# Altium PCB PCB_BTRC.PcbDoc
Units mm, origin at the board's own origin, x right, y up, seen from the top; angles counter-clockwise.
Board outline 112.57 x 70.97 mm, 2 copper layers (Top Layer, Bottom Layer); 51 components, 27 nets, 169 pads, 33 vias.
Unrouted connection lines stored in the file: 1.
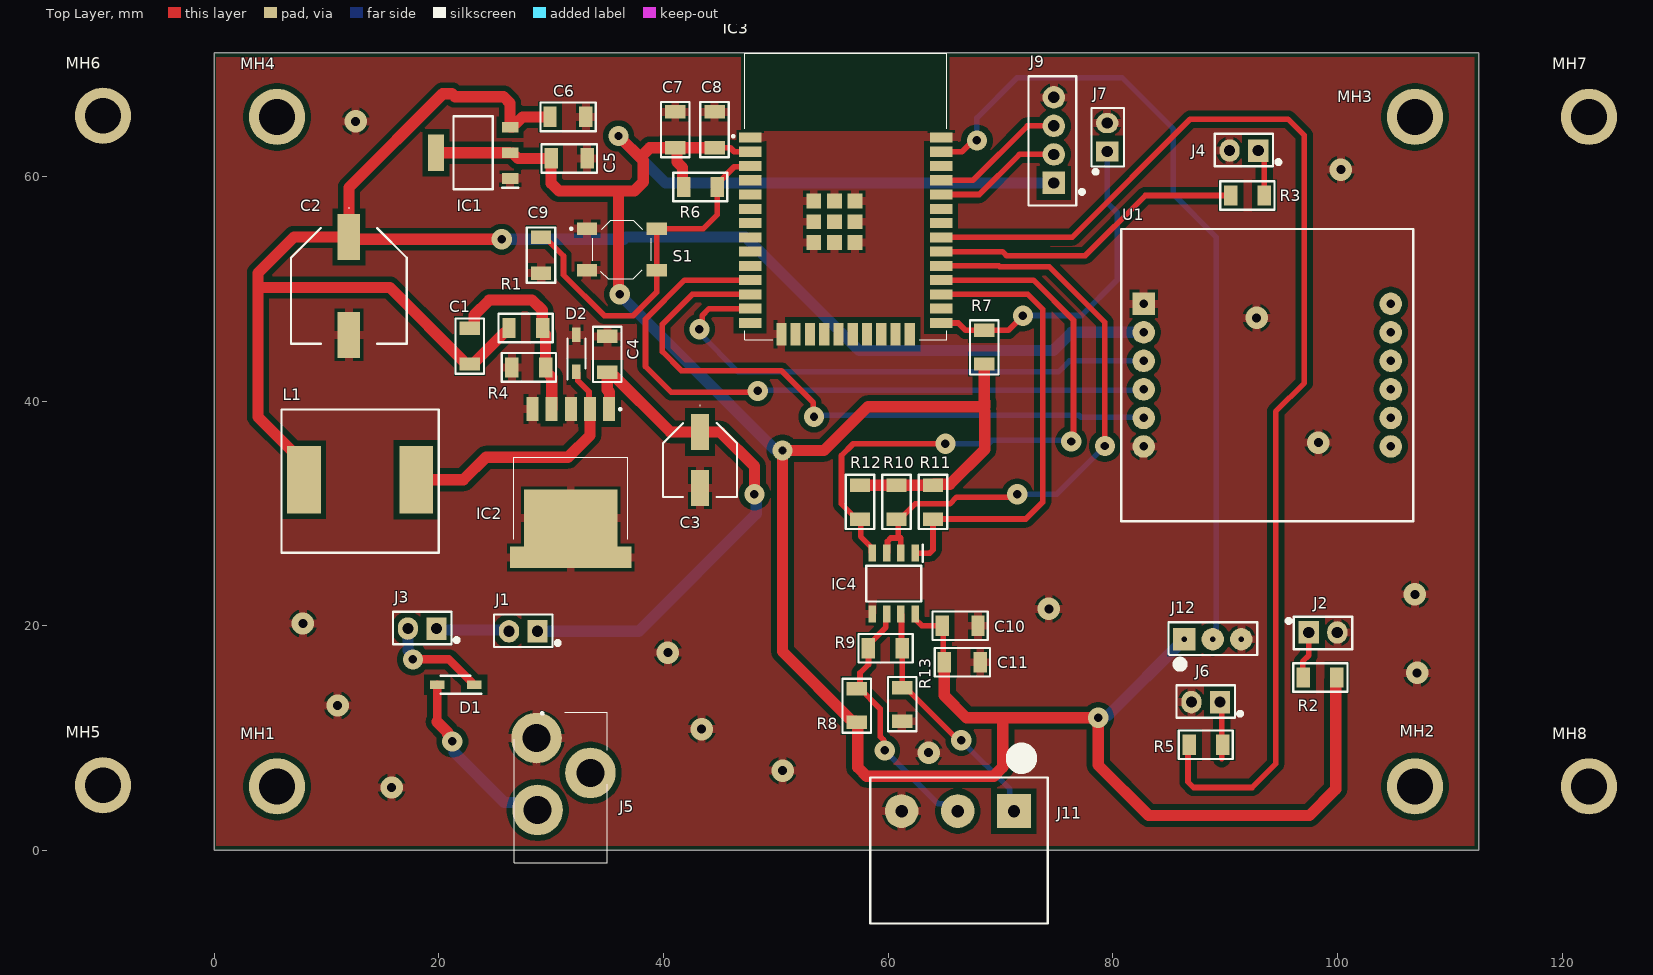
[diagram p0: Top Layer view]
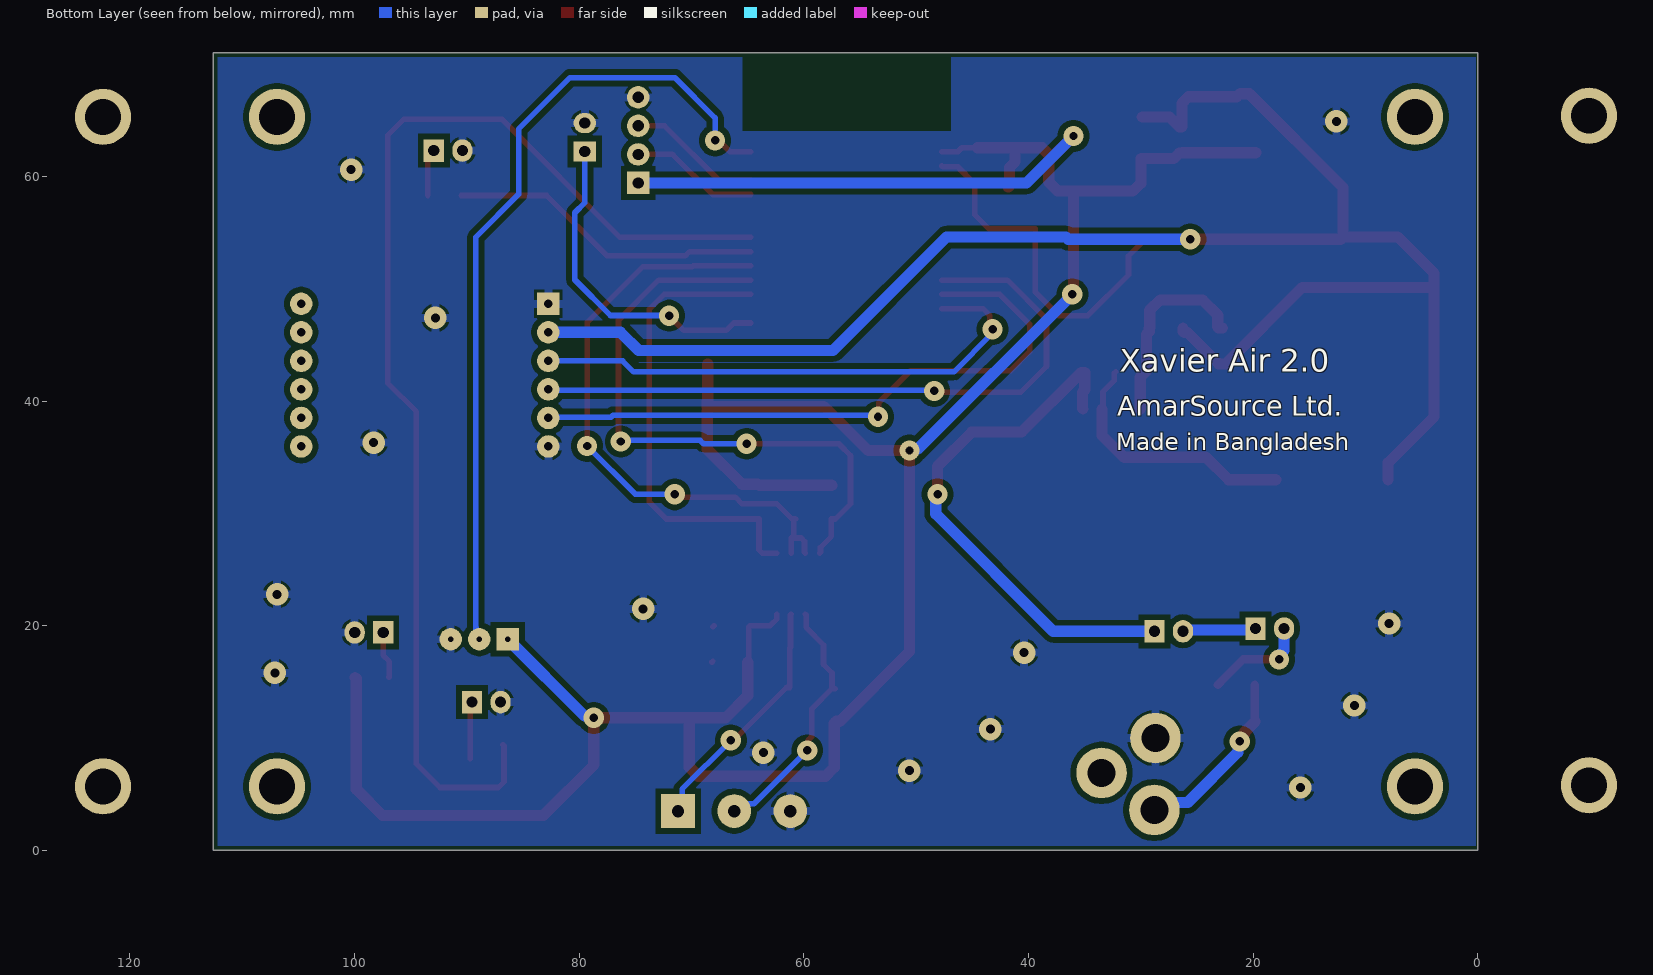
[diagram p1: Bottom Layer view, seen from below]

## Layer stack, top to bottom
Top Solder: solder mask 0.0102, Solder Resist, Dk 3.5
Top Layer: signal copper 0.0356
Dielectric 1: dielectric 0.32, FR-4, Dk 4.8
Bottom Layer: signal copper 0.0356
Bottom Solder: solder mask 0.0102, Solder Resist, Dk 3.5

## Board outline
0,0.03 112.569,0.03 112.569,71 0,71

## Design rules (kind name [scope] priority, off if disabled: settings)
Clearance [All] p1: gap=0.5 ignorepadtopadclearanceinfootprint=FALSE
ComponentClearance [All] p1: gap=0.5 collisioncheckmode=3 verticalgap=0.5 showdistances=FALSE
PolygonConnect [All] p1: connectstyle=Relief reliefconductorwidth=0.75 reliefentries=4 polygonreliefangle="90 Angle" airgapwidth=0.254
RoutingVias [All] p1: holewidth=0.75 width=1.8 viastyle="Through Hole" minholewidth=0.75 minwidth=1.8 maxholewidth=0.75 maxwidth=1.8
SolderMaskExpansion [All] p1: expansion=0.102 istentingtop=FALSE
UnRoutedNet [All] p1: checkbadconnections=TRUE
Width [All] p1: maxlimit=1 minlimit=0.5 preferedwidth=0.5
28 further rules are at their usual default settings.

## Components (designator, comment, footprint, x,y, rotation, side; value= is the part's Value field where it differs from the comment)
C1 "100nF" CAPC3216X100N 22.75,46.5 r270 top
C2 "EEE-TC1E221P" EEE0JA152UAP 12,50.25 r270 top
C3 "100uF" EEE0JA331XP 43.25,34.75 r270 top
C4 "100nF" CAPC3216X100N 35,42.55 r90 top
C5 "10uF" CAPC3216X100N 30,61.6 r0 top
C6 "10uF" CAPC3216X100N 29.9,65.3 r0 top
C7 "22uF" CAPC3216X100N 41.05,62.55 r90 top
C8 "100nF" CAPC3216X100N 44.55,62.55 r90 top
C9 "100nF" CAPC3216X100N 29.1,54.6 r270 top
C10 "100nF" CAPC3216X100N 64.8,20 r0 top
C11 "10uF" CAPC3216X100N 65,16.75 r0 top
D1 "MBR0520" SOD3716X120N 21.5,14.75 r180 top
D2 "MBR0520" SOD3716X120N 32.25,44.25 r90 top
IC1 "AMS1117-3.3" SOT229P700X180-4N 23.05,62.1 r180 top
IC2 "LM2596S-ADJ_NOPB" LM2596SXADJ 31.75,32.75 r90 top
IC3 "ESP32_WROOM32" ESP32WROOM32 55.215,55.965 r0 top
IC4 "MAX485EESA+" SOIC127P600X175-8N 60.5,23.75 r270 top
J1 "Fuse" HDR_1x2_2.54mm 28.79,19.5 r180 top
J2 "POWER_LED" HDR_1x2_2.54mm 97.45,19.4 r0 top
J3 "Switch" HDR_1x2_2.54mm 19.79,19.75 r180 top
J4 "STATUS_LED" HDR_1x2_2.54mm 92.94,62.3 r180 top
J5 "power_jack" power_jack 28.7,10 r90 top
J6 "USER_LED" HDR_1x2_2.54mm 89.54,13.2 r180 top
J7 "BOOT" HDR_1x2_2.54mm 79.5,62.21 r90 top
J9 "Hdr_1x4_2.54mm" Hdr_1x4_2.54mm 74.75,59.42 r180 top
J11 "Hdr_1x3_5mm" Hdr_1x3_5.0mm 71.2,3.5 r270 top
J12 "Hdr_1x3_2.54mm" Hdr_1x3_2.54mm 86.36,18.8 r90 top
L1 "Inductor_12x12mm" Inductor_12x12mm 13,33 r180 top
MH1 "MH_7.4MMNC_3.2MMD" MH_7.4MMNC_3.2MMD_NON_COPPER_NPTH 5.6,5.7 r0 top
MH2 "MH_7.4MMNC_3.2MMD" MH_7.4MMNC_3.2MMD_NON_COPPER_NPTH 106.9,5.7 r0 top
MH3 "MH_7.4MMNC_3.2MMD" MH_7.4MMNC_3.2MMD_NON_COPPER_NPTH 106.9,65.3 r0 top
MH4 "MH_7.4MMNC_3.2MMD" MH_7.4MMNC_3.2MMD_NON_COPPER_NPTH 5.6,65.3 r0 top
MH5 "MH_7.4MMNC_3.2MMD" MH_7.4MMNC_3.2MMD_NON_COPPER_NPTH -9.9,5.8 r0 top
MH6 "MH_7.4MMNC_3.2MMD" MH_7.4MMNC_3.2MMD_NON_COPPER_NPTH -9.9,65.4 r0 top
MH7 "MH_7.4MMNC_3.2MMD" MH_7.4MMNC_3.2MMD_NON_COPPER_NPTH 122.4,65.3 r0 top
MH8 "MH_7.4MMNC_3.2MMD" MH_7.4MMNC_3.2MMD_NON_COPPER_NPTH 122.4,5.7 r0 top
R1 "3k3" RESC3216X75N 29.25,46.5 r180 top
R2 "1K" RESC3216X75N 96.95,15.4 r0 top
R3 "1K" RESC3216X75N 93.5,58.3 r180 top
R4 "1K" RESC3216X75N 26.5,43 r0 top
R5 "1K" RESC3216X75N 89.8,9.4 r180 top
R6 "10K" RESC3216X75N 44.8,59.05 r180 top
R7 "10K" RESC3216X75N 68.55,46.3 r270 top
R8 "20K" RESC3216X75N 57.2,14.4 r270 top
R9 "120R" RESC3216X75N 58.25,18 r0 top
R10 "10K" RESC3216X75N 60.75,29.5 r90 top
R11 "10K" RESC3216X75N 64,29.5 r90 top
R12 "10K" RESC3216X75N 57.5,29.5 r90 top
R13 "20K" RESC3216X75N 61.25,11.5 r90 top
S1 "SMD-PUSH-BTN-5.2mm" SMS_PUSH_BTN_5.2x5.2mm 36.3,53.5 r0 top
U1 "SIM7600G" SIM7600G_Module 82.75,48.66 r0 top

## Footprints (in the part's own frame and the unit in brackets; to place one, negate y for a bottom-side part, rotate by r counter-clockwise, add the part's x,y. Pads: shape width x height; smd on the part's side, far side on the other; paste and mask are expansions set on the pad)
CAPC3216X100N [mm]
  rect 1.2x1.82 smd: 1(0,0) 2(3.2,0)
  silkscreen extent -0.85,-1.27 4.08,1.27, body extent 0,-0.8 3.2,0.8, height 1.6
EEE0JA152UAP [mm]
  rect 4.1x2 smd: 1(-4.35,0) 2(4.35,0)
  silkscreen extent -6.98,-5.15 5.15,5.15, body extent -5.81,-5.15 5.89,5.15, height 10.2
EEE0JA331XP [mm]
  rect 3.2x1.6 smd: 1(-2.5,0) 2(2.5,0)
  silkscreen extent -4.88,-3.3 3.3,3.3, body extent 0,0 0,0
ESP32WROOM32 [mm]
  rect 2x0.9 smd: 1(-7.5,7.5) 2(-7.5,6.23) 3(-7.5,4.96) 4(-7.5,3.69) 5(-7.5,2.42) 6(-7.5,1.15) 7(-7.5,-0.12) 8(-7.5,-1.39) 9(-7.5,-2.66) 10(-7.5,-3.93) 11(-7.5,-5.2) 12(-7.5,-6.47) 13(-7.5,-7.74) 14(-7.5,-9.01) 25(9.5,-9.01) 26(9.5,-7.74) 27(9.5,-6.47) 28(9.5,-5.2) 29(9.5,-3.93) 30(9.5,-2.66) 31(9.5,-1.39) 32(9.5,-0.12) 33(9.5,1.15) 34(9.5,2.42) 35(9.5,3.69) 36(9.5,4.96) 37(9.5,6.23) 38(9.5,7.5)
  rect 0.9x2 smd: 15(-4.715,-10.01) 16(-3.445,-10.01) 17(-2.175,-10.01) 18(-0.905,-10.01) 19(0.365,-10.01) 20(1.635,-10.01) 21(2.905,-10.01) 22(4.175,-10.01) 23(5.445,-10.01) 24(6.715,-10.01)
  rect 1.33x1.33 smd: 39(-1.835,1.835) 40(0,1.835) 41(1.835,1.835) 42(-1.835,0) 43(0,0) 44(1.835,0) 45(-1.835,-1.835) 46(0,-1.835) 47(1.835,-1.835)
  silkscreen extent -9.1,-10.51 10,14.99, body extent -8,-10.5 10,15, height 3.1
HDR_1x2_2.54mm [mm]
  rect 1.8x2 hole 1: 1(0,0)
  oval 1.8x2 hole 1: 2(2.54,0)
  silkscreen extent -1.9,-1.5 3.87,1.4
Hdr_1x3_2.54mm [mm]
  rect 2x2 hole 0.5: 1(0,0)
  round 2 hole 0.5: 2(0,-2.54) 3(0,-5.08)
  silkscreen extent -2.54,-6.5 1.5,1.4, body extent -1.17,-6.32 1.37,1.3, height 6.03
Hdr_1x3_5.0mm [mm]
  rect 3x3 hole 1.1: 1(0,0)
  round 3 hole 1.1: 2(0,-5) 3(0,-10)
  silkscreen extent -5.1,-12.8 10,3
Hdr_1x4_2.54mm [mm]
  rect 2x2 hole 1: 1(0,0)
  round 2 hole 1: 2(0,-2.54) 3(0,-5.08) 4(0,-7.62)
  silkscreen extent -2.6,-9.5 2.25,2
Inductor_12x12mm [mm]
  rect 3x6 smd: 1(-5,0) 2(5,0)
  silkscreen extent -7,-6.25 7,6.5
LM2596SXADJ [mm]
  rect 2.16x1.07 smd: 1(6.545,-3.4) 2(6.545,-1.7) 3(6.545,0) 4(6.545,1.7) 5(6.545,3.4)
  rect 1.91x10.8 smd: T1(-6.67,0)
  rect 5.08x8.33 smd: T2(-3.175,0)
  silkscreen extent -5.06,-5.08 6.64,5.08, body extent -7.2,-5.21 7.19,5.2, height 4.8
MH_7.4MMNC_3.2MMD_NON_COPPER_NPTH [mm]
  round 5 hole 3.2 unplated: 1(0,0)
power_jack [mm]
  round 4.5 hole 2.5: 1(0,0) 2(-3.1,-4.8) 3(-6.4,-0.1)
  silkscreen extent -11.1,-6.3 2.3,2
RESC3216X75N [mm]
  rect 1.2x1.8 smd: 1(0,0) 2(3,0)
  silkscreen extent -0.89,-1.27 3.94,1.27, body extent -0.1,-0.8 3.1,0.8, height 0.75
SIM7600G_Module [mm]
  rect 2x2 hole 0.76: 1(0,0)
  round 2 hole 0.76: 2(0,-2.54) 3(0,-5.08) 4(0,-7.62) 5(0,-10.16) 6(0,-12.7) 7(22,-12.7) 8(22,-10.16) 9(22,-7.62) 10(22,-5.08) 11(22,-2.54) 12(22,0)
  silkscreen extent -2,-19.35 24,6.65
SMS_PUSH_BTN_5.2x5.2mm [mm]
  rect 1.8x1.1 smd: 1(-3.1,1.85) 2(3.1,1.85) 3(-3.1,-1.85) 4(3.1,-1.85)
  silkscreen extent -4.6,-2.6 2.6,2.6
SOD3716X120N [mm]
  rect 1.3x0.75 smd: 1(-1.65,0) 2(1.65,0)
  silkscreen extent -2.3,-0.8 1.33,0.8, body extent -1.85,-0.8 1.85,0.8, height 1.2
SOIC127P600X175-8N [mm]
  rect 1.525x0.65 smd: 1(-2.712,1.905) 2(-2.712,0.635) 3(-2.712,-0.635) 4(-2.712,-1.905) 5(2.712,-1.905) 6(2.712,-0.635) 7(2.712,0.635) 8(2.712,1.905)
  silkscreen extent -3.47,-2.45 1.6,2.58, body extent -3,-2.45 3,2.45, height 1.75
SOT229P700X180-4N [mm]
  rect 1.45x0.95 smd: 1(-3.3,2.29) 2(-3.3,0) 3(-3.3,-2.29)
  rect 1.45x3.25 smd: 4(3.3,0)
  silkscreen extent -4.03,-3.25 1.75,3.25, body extent -3.35,-3.15 3.35,3.15, height 1.8

## Part data
C1 C4 C5 C6 C7 C8 C9 C10 C11: library part C3216X5R1C106K085AC, "Capacitor", Manufacturer_Name=TDK, Mouser Part Number=810-C3216X5R1C106K0C, Datasheet Link=https://product.tdk.com/info/en/catalog/datasheets/mlcc_commercial_midvoltage_en.pdf, Height=1mm, Manufacturer_Part_Number=C3216X5R1C106K085AC, Mouser Price/Stock=https://www.mouser.com/Search/Refine.aspx?Keyword=810-C3216X5R1C106K0C
C2: "Capacitor Polarised", Manufacturer_Name=Panasonic, Mouser Part Number=667-EEE-TC1E221P, Arrow Part Number=EEE-TC1E221P, Arrow Price/Stock=https://www.arrow.com/en/products/eee-tc1e221p/panasonic?region=nac, Datasheet Link=http://industrial.panasonic.com/cdbs/www-data/pdf/RDE0000/ABA0000C678.pdf, Height=12mm, Manufacturer_Part_Number=EEE-TC1E221P, Mouser Price/Stock=https://www.mouser.co.uk/ProductDetail/Panasonic/EEE-TC1E221P?qs=367PjNmvCmnTZpcwe6iq6Q%3D%3D
C3: library part EEE-TC1C101XP, "Capacitor Polarised", Manufacturer_Name=Panasonic, Mouser Part Number=667-EEE-TC1C101XP, Arrow Part Number=EEE-TC1C101XP, Arrow Price/Stock=https://www.arrow.com/en/products/eee-tc1c101xp/panasonic, Datasheet Link=http://industrial.panasonic.com/cdbs/www-data/pdf/RDE0000/ABA0000C678.pdf, Height=7.8mm, Manufacturer_Part_Number=EEE-TC1C101XP, Mouser Price/Stock=https://www.mouser.co.uk/ProductDetail/Panasonic/EEE-TC1C101XP?qs=367PjNmvCmntb8uQ4S3WYg%3D%3D
D1 D2: "Schottky Diode", Manufacturer_Name=Shikues, Datasheet Link=https://datasheet.lcsc.com/szlcsc/2001131004_Shikues-MBR0520_C475717.pdf, Height=1.2mm, Manufacturer_Part_Number=MBR0520
IC1: "Integrated Circuit", Manufacturer_Name=Advanced, Datasheet Link=https://datasheet.datasheetarchive.com/originals/distributors/Datasheets-28/DSA-550594.pdf, Height=1.8mm, Manufacturer_Part_Number=AMS1117-3.3
IC2: "Integrated Circuit", Arrow Part Number=LM2596S-ADJ/NOPB, Manufacturer_Name="Texas Instruments", Mouser Part Number=926-LM2596S-ADJ/NOPB, Arrow Price/Stock=https://www.arrow.com/en/products/lm2596s-adjnopb/texas-instruments?region=nac, Datasheet Link=https://www.ti.com/lit/ds/symlink/lm2596.pdf?HQS=ti-null-null-sf-df-pf-sep-wwe&ts=1592978195629, Height=4.57mm, Manufacturer_Part_Number=LM2596S-ADJ/NOPB, Mouser Price/Stock=https://www.mouser.co.uk/ProductDetail/Texas-Instruments/LM2596S-ADJ-NOPB?qs=X1J7HmVL2ZHoMN0DLDcNog%3D%3D
IC3: "Integrated Circuit", Manufacturer_Name="Espressif Systems", Manufacturer_Part_Number="ESP32 WROOM32", Datasheet Link=https://www.espressif.com/sites/default/files/documentation/esp32-wroom-32_datasheet_en.pdf, Height=3.2mm
IC4: "Integrated Circuit", Manufacturer_Name="Analog Devices", Mouser Part Number=700-MAX485EESA, Arrow Part Number=MAX485EESA+, Arrow Price/Stock=https://www.arrow.com/en/products/max485eesa/maxim-integrated?region=nac, Datasheet Link=http://datasheets.maximintegrated.com/en/ds/MAX1487E-MAX491E.pdf, Height=1.75mm, Manufacturer_Part_Number=MAX485EESA+, Mouser Price/Stock=https://www.mouser.co.uk/ProductDetail/Analog-Devices-Maxim-Integrated/MAX485EESA%2b?qs=1THa7WoU59HlqXlxuUW1Fg%3D%3D
J1 J2 J3 J4 J6 J7: library part Hdr_1x2_2.54mm
J5: "Connector", Manufacturer_Name=LUMBERG, Manufacturer_Part_Number="1613 20", Datasheet Link=http://www.farnell.com/datasheets/2349122.pdf, Height=7mm
L1: "Inductor", Manufacturer_Name="Wurth Elektronik", Manufacturer_Part_Number=744774147, Mouser Part Number=710-744774147, Mouser Price/Stock=https://www.mouser.co.uk/ProductDetail/Wurth-Elektronik/744774147?qs=rS3zZhy2AQMMwor0dxnQcQ%3D%3D
R1 R2 R3 R4 R5 R6 R7 R8 R9 R10 R11 R12 R13: library part CR1206-F_-2R00ELF, "Resistor", Manufacturer_Name=Bourns, Manufacturer_Part_Number=CR1206-F/-2R00ELF, Mouser Part Number=652-CR1206-F/2R00ELF, Height=0.75mm, Mouser Price/Stock=https://www.mouser.co.uk/ProductDetail/Bourns/CR1206-F-2R00ELF?qs=W%2FMpXkg%252BdQ47Z%2FeZv1nDSg%3D%3D
S1: "Switch", Arrow Part Number=COM-08720, Manufacturer_Name=SparkFun, Mouser Part Number=474-COM-08720, Arrow Price/Stock=https://www.arrow.com/en/products/com-08720/sparkfun-electronics?region=nac, Datasheet Link=https://www.sparkfun.com/datasheets/Components/Buttons/SMD-Button.pdf, Height=1.6mm, Manufacturer_Part_Number=COM-08720, Mouser Price/Stock=https://www.mouser.co.uk/ProductDetail/SparkFun/COM-08720?qs=WyAARYrbSnaaMDwitZjU3A%3D%3D
U1: library part SIM7600G_Module

## Via types
v1: diameter 1.8, hole 0.75, Top Layer to Bottom Layer, 19 vias
v2: diameter 2, hole 0.8, Top Layer to Bottom Layer, 14 vias

## Nets (pads, with @x,y where several pads share a name; then routed paths per layer and width w, separated by ;. In a path a pad name is that pad's centre, name@x,y a point inside that pad or via, vN(x,y) a via of type N, cw(c..) or ccw(c..) an arc to the next point about the centre after c; other vN are vias at no path point)
+3V3: C5.1 C7.1 C8.1 C10.1 C11.1 IC1.2 IC1.4 IC3.2 IC4.8 J9.1 J12.1 R2.2 R6.2 R7.2 R8.2 R10.2 R11.2 R12.2 | length 271.2
  Top Layer w0.5: C8.1 45.95,62.55 46.3,62.2 47.71,62.2 IC3.2 ; IC4.8 62.405,20.6 63.006,20 C10.1 64.9,19.9 64.9,16.85 C11.1
  Top Layer w1: IC1.4 IC1.2 26.375,62.075 26.575,62.075 27.05,61.6 C5.1 30,59.4 30.7,58.7 36,58.7 ; v1(36,63.6) 38.2,61.4 38.2,59.5 37.4,58.7 36,58.7 ; v1(36.1,49.5) 36,49.6 36,58.7 ; 38.2,61.964 38.786,62.55 C7.1 C7.1@41.1,62.55 ; R6.2 41.7,59.15 41.7,60.8 41.2,61.3 41.2,62.45 C7.1@41.1,62.55 ; C8.1 C7.1@41.1,62.55 ; R12.2 R10.2 R11.2 64.1,32.6 65.5,32.6 68.6,35.7 68.6,39.1 ; C11.1 65,13.786 66.986,11.8 70.2,11.8 ; R7.2 68.55,39.981 68.6,39.931 68.6,39.5 58.2,39.5 54.3,35.6 v1(50.6,35.6) 50.6,17.7 56.8,11.5 57.1,11.5 R8.2 57.3,11.3 57.3,7.386 58.086,6.6 69.4,6.6 70.2,7.4 70.2,11.8 ; R2.2 99.85,15.3 99.85,5.45 97.5,3.1 83.2,3.1 78.7,7.6 v1(78.7,11.8) 70.2,11.8
  Bottom Layer w1: v1(36,63.6) 40.18,59.42 J9.1 ; v1(36.1,49.5) 49.847,35.753 50.447,35.753 v1(50.6,35.6) ; v1(78.7,11.8) 78.853,11.953 79.513,11.953 J12.1
+5V: C1.2 C2.1 C6.1 IC1.3 L1.2 R1.2 U1.2 | length 160.6
  Top Layer w1: L1.2 8,34.5 3.9,38.6 3.9,50.1 ; v1(25.6,54.4) 12.2,54.4 C2.1 ; R1.2 26.25,46.2 26.15,46.1 25.86,46.1 23.06,43.3 C1.2 22.44,43.3 15.64,50.1 3.9,50.1 ; C6.1 27.46,65.3 26.55,64.39 IC1.3 26.35,66.514 25.764,67.1 21.437,67.1 21.182,67.355 20.353,67.355 12,59.001 C2.1 ; 3.9,50.1 3.9,51.4 7.1,54.6 C2.1
  Bottom Layer w1: v1(25.6,54.4) 36.458,54.4 36.658,54.6 47.3,54.6 57.4,44.5 74.7,44.5 76.32,46.12 U1.2
+12V: C3.1 C4.1 IC2.1 J1.1 | length 48
  Top Layer w1: IC2.1 35.185,39.33 35.185,40.785 35.2,40.8 35,41 C4.1 35.31,42.55 40.61,37.25 45.05,37.25 48.1,34.2 v1(48.1,31.7)
  Bottom Layer w1: J1.1 37.8,19.5 48.253,29.953 48.253,31.547 v1(48.1,31.7)
BOOT_Pin: IC3.25 J7.1 R7.1 | length 29.6
  Top Layer w0.5: IC3.25 66.245,46.955 66.9,46.3 R7.1 70.7,46.3 v1(72,47.6)
  Bottom Layer w0.5: v1(72,47.6) 72.017,47.617 77.217,47.617 80.4,50.8 80.4,56.763 79.5,57.663 J7.1
EN_Pin: C9.1 IC3.3 R6.1 S1.2 S1.4 | length 32.9
  Top Layer w0.5: C9.1 29.41,54.6 31.1,52.91 31.1,51.239 34.739,47.6 37.3,47.6 39.4,49.7 S1.4 S1.2 43.55,55.35 44.8,56.6 R6.1 44.8,59.35 46.305,60.855 47.645,60.855 IC3.3
GND: C2.2 C3.2 C4.2 C5.2 C6.2 C7.2 C8.2 C9.2 C10.2 C11.2 D2.2 IC1.1 IC2.3 IC2.5 IC2.T1 IC2.T2 IC3.1 IC3.15 IC3.38 IC3.39 IC3.40 IC3.41 IC3.42 IC3.43 IC3.44 IC3.45 IC3.46 IC3.47 IC4.5 J2.2 J4.2 J5.1 J6.2 J7.2 J9.4 J11.3 J12.3 R4.1 R13.1 S1.1 S1.3 U1.1 U1.6 | length 0.3
  Top Layer w0.5: C10.2 C10.2@68.1,19.9 ; C11.2@68.1,16.85 C11.2
  other v2: 15.8,5.6 50.6,7.1 63.6,8.7 43.4,10.8 11,12.9 107.1,15.8 40.4,17.6 7.9,20.2 74.3,21.5 106.9,22.8 98.3,36.3 92.8,47.4 100.3,60.6 12.6,64.9
GSM_Rst: IC3.13 U1.3 | length 47.6
  Top Layer w0.5: v1(43.2,46.4) 43.449,46.649 43.449,47.612 44.062,48.225 IC3.13
  Bottom Layer w0.5: v1(43.2,46.4) 43.2,46.048 46.648,42.6 75.155,42.6 76.135,43.58 U1.3
GSM_Rx: IC3.11 U1.4 | length 60.4
  Top Layer w0.5: IC3.11 41.879,50.765 38.4,47.286 38.4,43.079 40.679,40.8 48.3,40.8 v1(48.4,40.9)
  Bottom Layer w0.5: v1(48.4,40.9) 48.47,40.97 82.68,40.97 U1.4
GSM_Tx: IC3.12 U1.5 | length 57.5
  Top Layer w0.5: IC3.12 42.562,49.495 39.9,46.833 39.9,44.4 41.6,42.7 50.5,42.7 53.333,39.867 53.333,38.667 v1(53.4,38.6)
  Bottom Layer w0.5: v1(53.4,38.6) 53.55,38.75 76.983,38.75 77.183,38.55 82.7,38.55 U1.5
IO_23: IC3.37 J12.2 | length 73.6
  Top Layer w0.5: IC3.37 66.572,62.195 67.577,63.2 v1(67.9,63.2)
  Bottom Layer w0.5: v1(67.9,63.2) 67.9,65.2 71.49,68.79 80.81,68.79 85.392,64.208 85.392,58.408 89.2,54.6 89.2,19.843 89.187,19.83 89.187,19.087 J12.2
NetC1_1: C1.1 IC2.4 R1.1 R4.2 | length 17.6
  Top Layer w1: C1.1 23.06,46.5 23.16,46.6 23.16,47.66 24.5,49 28.3,49 29.214,48.086 29.214,46.536 R1.1 29.25,46.2 29.5,45.95 R4.2 29.5,42.7 30.05,42.15 IC2.4
NetD1_1: D1.1 J3.2 | length 9.3
  Top Layer w0.75: v1(17.7,17) 20.9,17 22.875,15.025 22.875,15 23,14.875 23.025,14.875 D1.1
  Bottom Layer w1: J3.2 17.25,17.802 17.7,17.352 v1(17.7,17)
NetD1_2: D1.2 J5.3 | length 15.5
  Top Layer w0.75: 19.85,11.45 D1.2
  Top Layer w1: 19.85,11.45 20.8,10.5 20.8,10.316 21.2,9.916 v1(21.2,9.7)
  Bottom Layer w1: v1(21.2,9.7) 21.353,9.547 21.353,8.747 25.83,4.27 J5.3@28.37,4.27
NetD2_1: D2.1 IC2.2 L1.1 | length 23.2
  Top Layer w0.5: D2.1 32.375,42.475 32.375,41.825 33.368,40.832 33.368,39.377 IC2.2
  Top Layer w1: L1.1 22.2,33 24.2,35 31.5,35 33.45,36.95 IC2.2
NetIC4_6: IC4.6 J11.2 R8.1 R9.1 | length 23.2
  Top Layer w0.5: R8.1 57.5,14.4 59.3,12.6 59.3,10.125 59.6,9.825 59.6,9 v1(59.7,8.9) ; R8.1@57.5,14.5 57.5,15.8 58.25,16.55 R9.1 58.25,18.3 59.79,19.84 59.79,20.963 IC4.6
  Bottom Layer w0.5: v1(59.7,8.9) 64.459,4.141 64.883,4.141 66.024,3 J11.2@66.25,3
NetIC4_7: IC4.7 J11.1 R9.2 R13.2 | length 22.1
  Top Layer w0.5: IC4.7 61.192,20.98 61.192,18.058 R9.2 R13.2 61.55,14.5 66.25,9.8 v1(66.5,9.8)
  Bottom Layer w0.5: v1(66.5,9.8) 70.843,5.457 70.843,3.407 J11.1@70.9,3.35
NetJ1_2: J1.2 J3.1 | length 6.6
  Bottom Layer w1: J3.1 19.915,19.625 26.125,19.625 J1.2
NetJ2_1: J2.1 R2.1 | length 4.2
  Top Layer w0.5: R2.1 96.9,15.45 96.9,16.8 97.45,17.35 J2.1
NetJ4_1: J4.1 R3.1 | length 4.2
  Top Layer w0.5: J4.1 93.5,61.74 R3.1
NetJ6_1: J6.1 R5.1 | length 5.1
  Top Layer w0.5: J6.1 89.7,13.04 89.7,8.15
RS486_Dir: IC3.29 IC4.2 IC4.3 R10.1 | length 54.2
  Top Layer w0.5: IC4.3 59.94,26.537 59.94,27.513 60.233,27.806 61.135,27.806 IC4.2 ; R10.1 60.785,29.5 61.05,29.5 62.4,30.85 65.499,30.85 66.1,31.451 71.251,31.451 v1(71.5,31.7) ; 60.917,27.806 R10.1@60.917,29.367 ; IC3.29 69.865,52.035 69.95,51.95 74.35,51.95 79.3,47 v1(79.3,36)
  Bottom Layer w0.5: v1(71.5,31.7) 75,31.7 v1(79.3,36)
RS486_Rx: IC3.27 IC4.1 R11.1 | length 41.6
  Top Layer w0.5: IC4.1 63.707,26.462 64,26.755 R11.1 72.253,29.5 73.75,30.997 73.75,48.183 72.438,49.495 IC3.27
RS486_Tx: IC3.28 IC4.4 R12.1 | length 55.2
  Top Layer w0.5: IC4.4 58.52,26.537 58.52,26.98 57.55,27.95 57.55,29.5 57.2,29.5 55.85,30.85 55.85,35.15 56.9,36.2 v1(65.1,36.2) ; IC3.28 72.935,50.765 76.5,47.2 76.5,36.6 v1(76.3,36.4)
  Bottom Layer w0.5: v1(65.1,36.2) 68.932,36.2 69.232,36.5 76.2,36.5 v1(76.3,36.4)
RX0: IC3.34 J9.2 | length 11.5
  Top Layer w0.5: IC3.34 68.117,58.385 71.692,61.96 J9.2
STATUS_LED: IC3.31 R5.2 | length 106.5
  Top Layer w0.5: IC3.31 74.175,54.575 74.2,54.6 76.4,54.6 86.9,65.1 95.6,65.1 97.05,63.65 97.05,41.625 94.5,39.075 94.5,7.7 92.4,5.6 87.2,5.6 86.7,6.1 86.7,9.3 R5.2
TX0: IC3.35 J9.3 | length 12
  Top Layer w0.5: IC3.35 67.555,59.655 72.4,64.5 J9.3
USER_LED: IC3.30 R3.2 | length 28.1
  Top Layer w0.5: IC3.30 70.18,53.305 70.535,52.95 77.55,52.95 82.9,58.3 R3.2
pads on no net: IC3.4 IC3.5 IC3.6 IC3.7 IC3.8 IC3.9 IC3.10 IC3.14 IC3.16 IC3.17 IC3.18 IC3.19 IC3.20 IC3.21 IC3.22 IC3.23 IC3.24 IC3.26 IC3.32 IC3.33 IC3.36 J5.2 MH1.1 MH2.1 MH3.1 MH4.1 MH5.1 MH6.1 MH7.1 MH8.1 U1.7 U1.8 U1.9 U1.10 U1.11 U1.12

## Polygon pours and split planes (outlines as drawn)
GND on Top Layer "TOP_Polygon" (solid, remove dead copper, pour order 1): 0.2,0.4 0.2,70.6 46.9,70.6 46.9,64 65.5,64 65.5,70.6 112.2,70.6 112.2,0.4
GND on Bottom Layer "BOTTOM_Polygon" (solid, remove dead copper, pour order 0): 0.2,70.6 46.9,70.6 46.9,64 65.5,64 65.5,70.6 112.2,70.6 112.2,0.4 0.2,0.4 0.2,0.6 0.2,0.4 0.2,0.6

## Silkscreen, mask and mechanical layers (free items; w line width, h text height)
Bottom Overlay:
  text "Xavier Air 2.0" at 31.9,42.6 h2
  text "AmarSource Ltd." at 32.1,38.7 h1.75
  text "Made in Bangladesh" at 32.2,35.6 h1.5
Board Outline:
  the board outline again, w0.2